# EAGLE board semáforo cruzamento (EAGLE 9.7.0)

Size 87.9 x 92.39 mm. Coordinates in mm from the lower left corner, seen from the top.
Outline: 0,0 87.9,0 87.9,92.39 0,92.39 0,0
Copper layers (1*16): Top 0.035mm / dielectric 1.5mm / Bottom 0.035mm
Design rules "default": minimum track width 6mil, minimum drill 0.35mm, track to track 6mil, track to pad 6mil, pad to pad 6mil, via to via 6mil, smd to smd 6mil, copper to edge 40mil, drill to drill 6mil, minimum pad ring 10mil, minimum via ring 8mil, stop-mask expansion 4mil, vias tented up to drill 0mil, thermal gap 10mil

## Footprints (pad centres in the part's own frame; a part is rotated, then mirrored left to right if it is on the bottom)
LEDRD254W60D565H860B_Y = drill 0.981 pad 1.581: 1 -1.27,0; 2 1.27,0
LEDRD254W60D565H860B_G = drill 0.981 pad 1.581: 1 -1.27,0; 2 1.27,0
LEDRD254W60D565H860B = drill 0.981 pad 1.581: 1 -1.27,0; 2 1.27,0
RESAD1016W63L850D250B = drill 0.83 pad 1.43: 1 -5.08,0; 2 5.08,0
ARDUINO-UNO-R3-SHIELD = drill 1.016 pad 1.88: 3.3V 24.13,-2.54; 5V 24.13,0; A0 24.13,12.7; A1 24.13,15.24; A2 24.13,17.78; A3 24.13,20.32; A4 24.13,22.86; A5 24.13,25.4; AREF -24.13,-13.97; D2 -24.13,20.32; D3 -24.13,17.78; D4 -24.13,15.24; D5 -24.13,12.7; D6 -24.13,10.16; D7 -24.13,7.62; D8 -24.13,3.81; D9 -24.13,1.27; D10 -24.13,-1.27; D11 -24.13,-3.81; D12 -24.13,-6.35; D13 -24.13,-8.89; GND@0 24.13,2.54; GND@1 24.13,5.08; GND@2 -24.13,-11.43; IOREF 24.13,-7.62; NC 24.13,-10.16; RES 24.13,-5.08; RX -24.13,25.4; SCL -24.13,-19.05; SDA -24.13,-16.51; TX -24.13,22.86; VIN 24.13,7.62

## Placement (x,y rotation side)
DLEDAMARELO  YELLOW  [LEDRD254W60D565H860B_Y]  60.94,84.48 180 top
DLEDPAMARELO  YELLOW  [LEDRD254W60D565H860B_Y]  12.68,84.48 180 top
DLEDPVERDE  GREEN  [LEDRD254W60D565H860B_G]  7.6,84.48 180 top
DLEDPVERMELHO  RED  [LEDRD254W60D565H860B]  17.76,84.48 180 top
DLEDVERDE  GREEN  [LEDRD254W60D565H860B_G]  55.86,84.48 180 top
DLEDVERMELHO  RED  [LEDRD254W60D565H860B]  66.02,84.48 180 top
R1  1k  [RESAD1016W63L850D250B]  64.75,71.78 90 top
R2  1k  [RESAD1016W63L850D250B]  59.67,71.78 90 top
R3  1k  [RESAD1016W63L850D250B]  54.59,71.78 90 top
R4  1k  [RESAD1016W63L850D250B]  16.49,71.78 90 top
R5  1k  [RESAD1016W63L850D250B]  11.41,71.78 90 top
R6  1k  [RESAD1016W63L850D250B]  6.33,71.78 90 top
U1  ARDUINO-UNO-R3-SHIELD  [ARDUINO-UNO-R3-SHIELD]  53.38,29.84 270 top

## Library data of the parts
DLEDAMARELO DLEDPAMARELO = Tinkercad; CATEGORY: Opto-Electronic; SUB-CATEGORY: LED; VALUE: LED_YELLOW
DLEDPVERDE DLEDVERDE = Tinkercad; CATEGORY: Opto-Electronic; SUB-CATEGORY: LED; VALUE: LED_GREEN
DLEDPVERMELHO DLEDVERMELHO = Tinkercad; CATEGORY: Opto-Electronic; SUB-CATEGORY: LED; VALUE: LED_RED
R1-R6 U1 = Tinkercad

## Nets
DLEDAMARELO_C: DLEDAMARELO.2 R2.2
DLEDPAMARELO_C: DLEDPAMARELO.2 R5.2
DLEDPVERDE_C: DLEDPVERDE.2 R6.2
DLEDPVERMELHO_C: DLEDPVERMELHO.2 R4.2
DLEDVERDE_C: DLEDVERDE.2 R3.2
DLEDVERMELHO_C: DLEDVERMELHO.2 R1.2
U1_D8: DLEDVERMELHO.1 U1.D8
U1_D9: DLEDAMARELO.1 U1.D9
U1_D10: DLEDVERDE.1 U1.D10
U1_D11: DLEDPVERMELHO.1 U1.D11
U1_D12: DLEDPAMARELO.1 U1.D12
U1_D13: DLEDPVERDE.1 U1.D13
U1_GND: R1.1 R2.1 R3.1 R4.1 R5.1 R6.1 U1.GND@0 U1.GND@1 U1.GND@2

## Tracks (layer width: path | path; a pad name or v marks a point on that pad's centre or on a via)
DLEDAMARELO_C  (1 unrouted)
DLEDPAMARELO_C  (1 unrouted)
DLEDPVERDE_C  (1 unrouted)
DLEDPVERMELHO_C  (1 unrouted)
DLEDVERDE_C  (1 unrouted)
DLEDVERMELHO_C  (1 unrouted)
U1_D8  (1 unrouted)
U1_D9  (1 unrouted)
U1_D10  (1 unrouted)
U1_D11  (1 unrouted)
U1_D12  (1 unrouted)
U1_D13  (1 unrouted)
U1_GND  (8 unrouted)